# Altium PCB Camera Board.PcbDoc
Units mm, origin at the board's own origin, x right, y up, seen from the top; angles counter-clockwise.
Board outline 34.9 x 40.62 mm, 2 copper layers (Top Layer, Bottom Layer); 38 components, 43 nets, 192 pads, 30 vias.
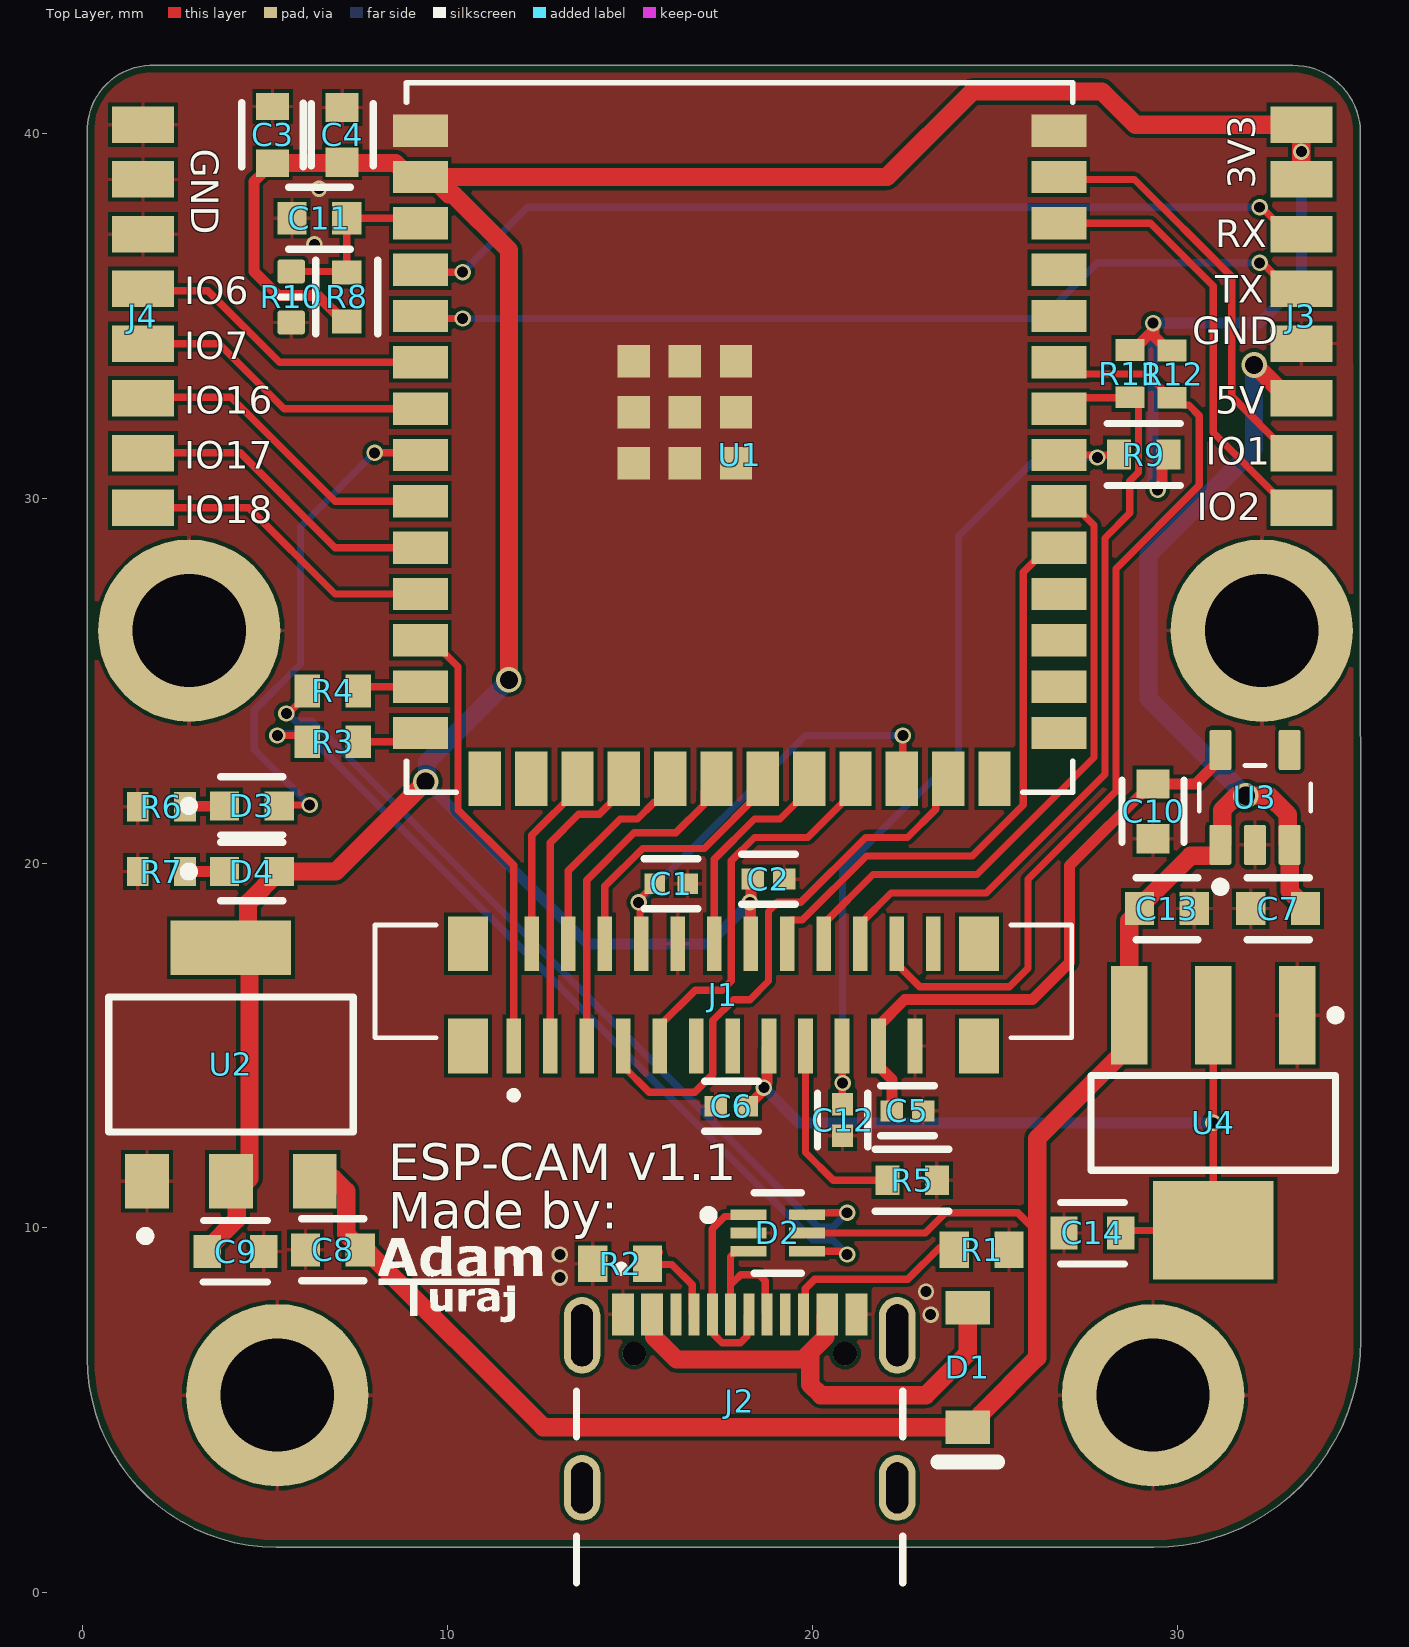
[diagram p0: Top Layer view]
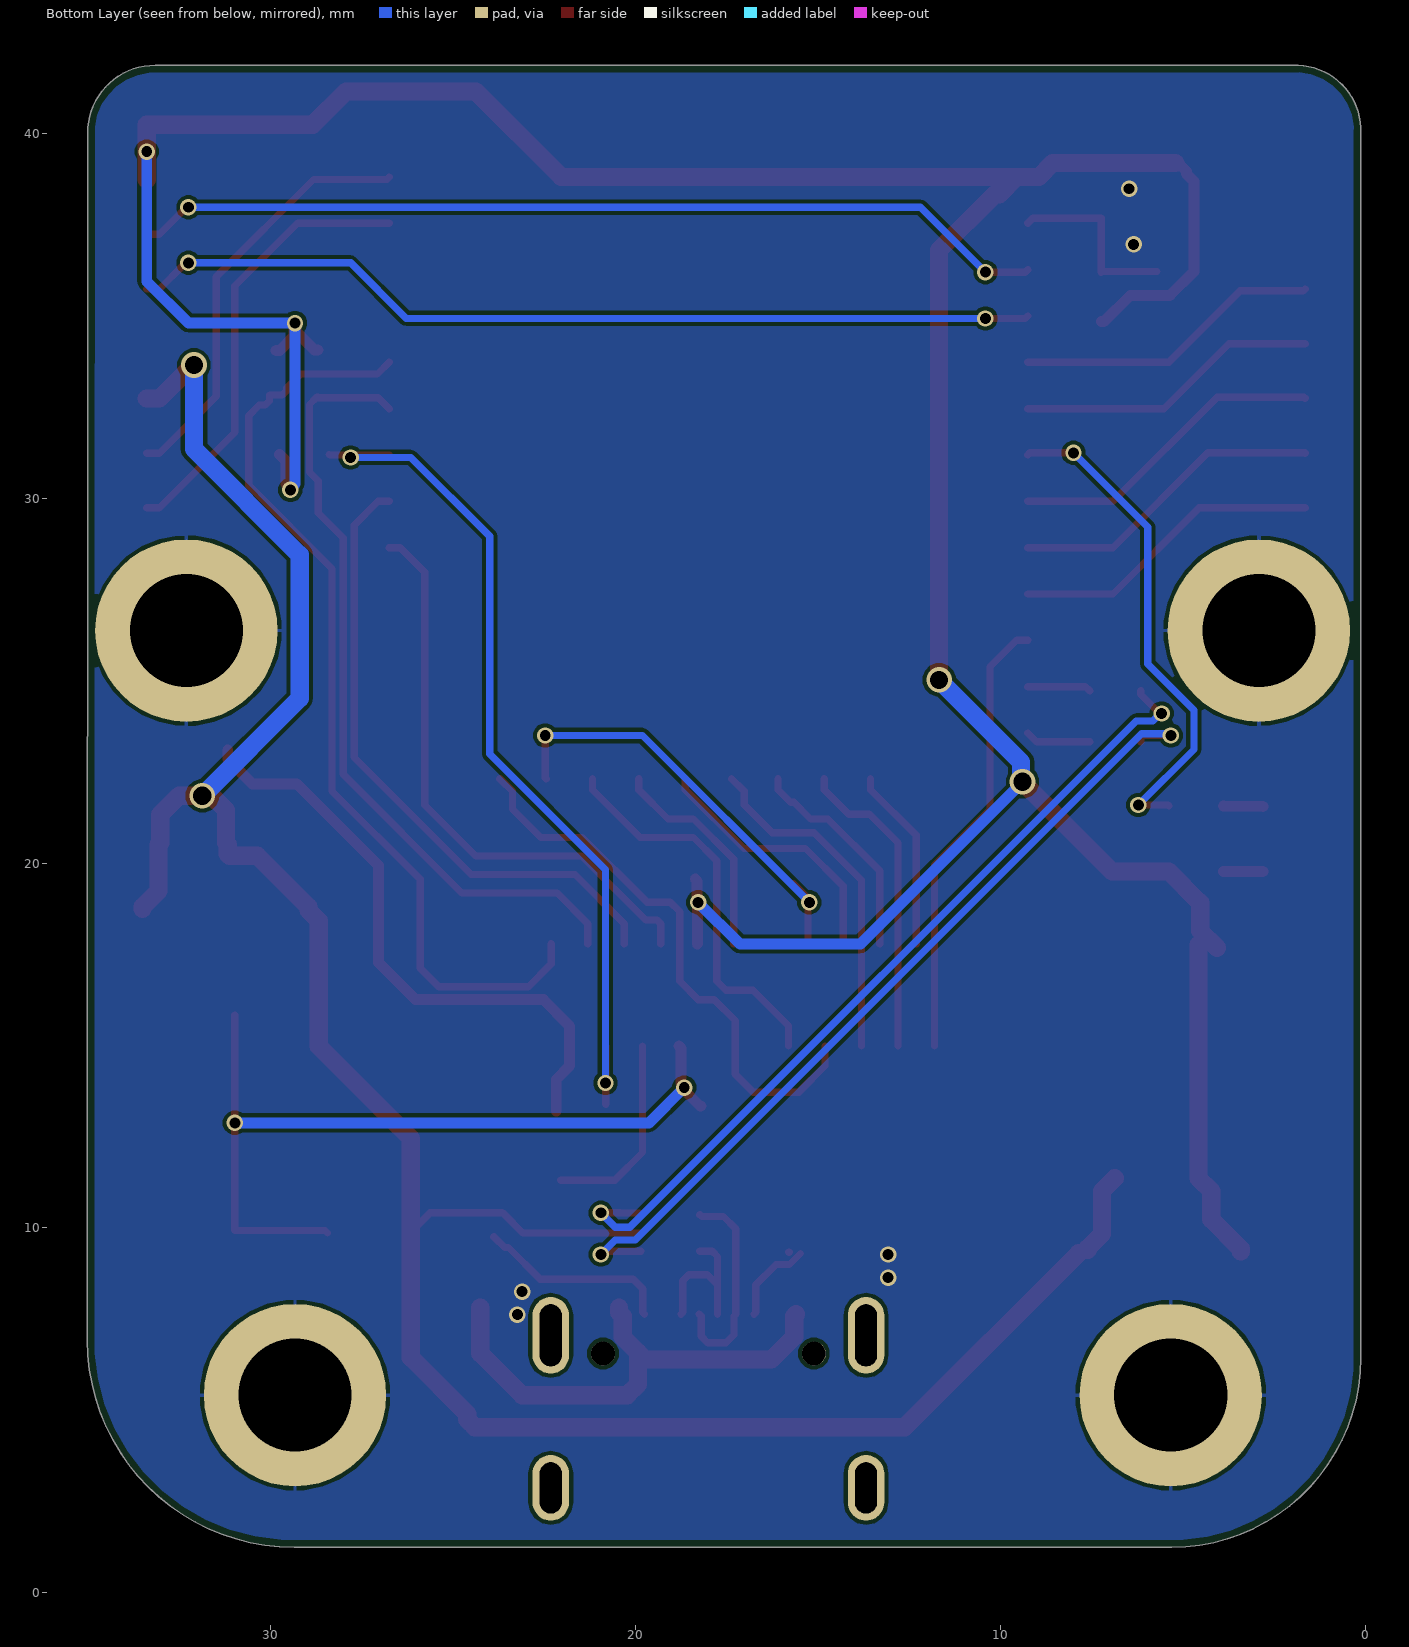
[diagram p1: Bottom Layer view, seen from below]
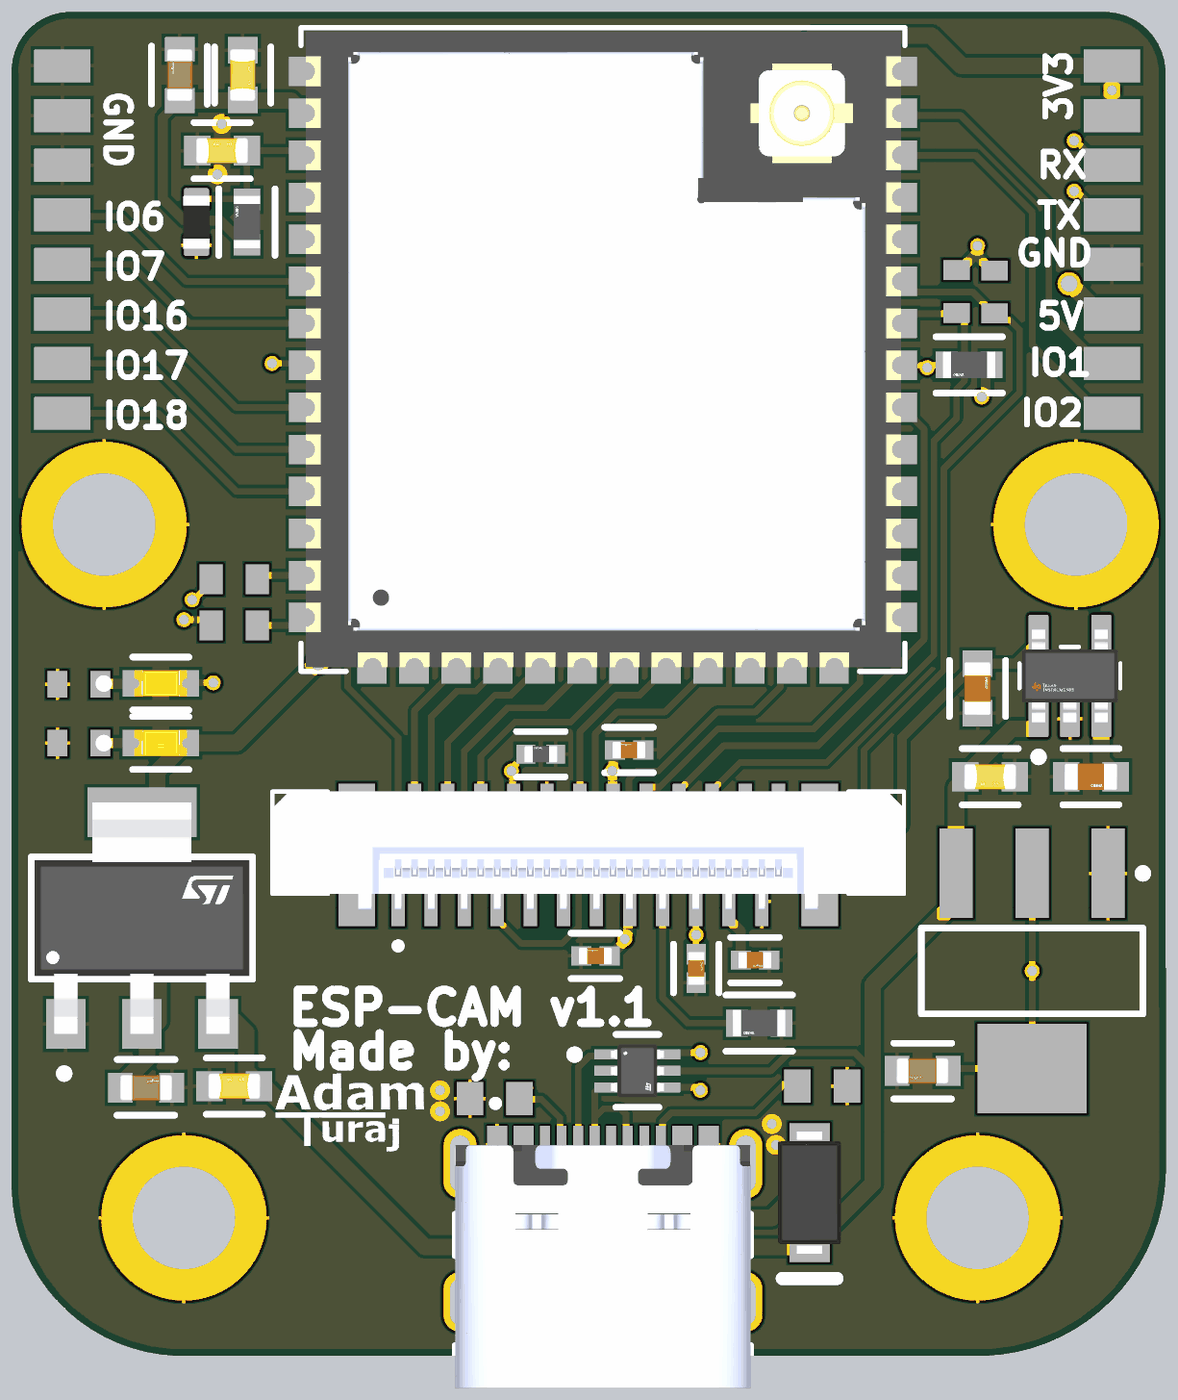
[diagram p2: 3D render of the assembled board from above, using the file's embedded part models]

## Layer stack, top to bottom
Top Solder: solder mask 0.0102, Solder Resist, Dk 3.5
Top Layer: signal copper 0.0356
Dielectric 1: dielectric 0.32, FR-4, Dk 4.8
Bottom Layer: signal copper 0.0356
Bottom Solder: solder mask 0.0102, Solder Resist, Dk 3.5

## Board outline
0.127,6.431 0.127,40.005 0.129,40.007 cw(c1.91,40.083) 1.993,41.864 33.167,41.864 cw(c33.167,40.01) 35.021,40.01 35.03,6.917 cw(c29.359,6.917) 29.359,1.246 5.312,1.246 cw(c5.312,6.431)

## Design rules (kind name [scope] priority, off if disabled: settings)
AcuteAngle [All] p1: minimum=6.00000000000000E+0001 checktracksonly=FALSE
BoardOutlineClearance [All] p1: gap=0.2 ignorepadtopadclearanceinfootprint=FALSE
Clearance [All] p1: gap=0.102 ignorepadtopadclearanceinfootprint=FALSE except(0.15: SMDPad-SMDPad; 0.202: Arc-THPad Track-THPad SMDPad-THPad Via-Via; 0.452: THPad-THPad)
DiffPairsRouting [All] p1: maxlimit=2 minlimit=0.15 mostfreqgap=0.15 toplayer_minwidth=0.2 toplayer_maxwidth=1816.048 toplayer_prefwidth=0.2 bottomlayer_minwidth=0.2 bottomlayer_maxwidth=1816.048 bottomlayer_prefwidth=0.2 maxuncoupledlength=12.7
Height [All] p1: minheight=0 maxheight=1816.048 prefheight=12.7
HoleSize [All] p1: absolutevalues=TRUE maxlimit=6.3 minlimit=0.15 maxpercent=80.000 minpercent=20.000
HoleToHoleClearance [All] p1: gap=0.2 allowstackedmicrovias=FALSE
MinimumAnnularRing [All] p1: minimumring=0.074
MinimumSolderMaskSliver [All] p1: minsoldermaskwidth=0
PlaneClearance [All] p1: clearance=0.102
PlaneConnect PlaneConnectPowerPads [InPadClass('PowerPads')] p1: planeconnectstyle=Direct reliefexpansion=0.508 reliefentries=4 reliefconductorwidth=0.254 reliefairgap=0.254
PlaneConnect [All] p2: pad.planeconnectstyle=Relief pad.reliefexpansion=0.3 pad.reliefentries=4 pad.reliefconductorwidth=0.102 pad.reliefairgap=0.102 via.planeconnectstyle=Direct via.reliefexpansion=0.3 via.reliefentries=4 via.reliefconductorwidth=0.127 via.reliefairgap=0.127
PolygonConnect "GND Connect ESP32" [HasFootprint('ESP32-S3-WROOM-1U_EXP')] p1: connectstyle=Direct reliefconductorwidth=0.254 reliefentries=4 polygonreliefangle="90 Angle" airgapwidth=0.254
PolygonConnect PolygonConnectPowerPads [All vs (InPadClass('PowerPads'))] p2: connectstyle=Direct reliefconductorwidth=0.254 reliefentries=4 polygonreliefangle="90 Angle" airgapwidth=0.254
PolygonConnect [All] p3: thpad.connectstyle=Relief thpad.reliefconductorwidth=0.102 thpad.reliefentries=4 thpad.polygonreliefangle="90 Angle" thpad.airgapwidth=0.102 smdpad.connectstyle=Relief smdpad.reliefconductorwidth=0.102 smdpad.reliefentries=4 smdpad.polygonreliefangle="90 Angle" smdpad.airgapwidth=0.102 via.connectstyle=Direct via.reliefconductorwidth=0.127 via.reliefentries=4 via.polygonreliefangle="90 Angle" via.airgapwidth=0.127
RoutingVias [All] p1: holewidth=0.2 width=0.45 viastyle="Through Hole" minholewidth=0.2 minwidth=0.45 maxholewidth=6.3 maxwidth=6.55
SilkToSilkClearance [All] p1: silktosilkclearance=0
SilkToSolderMaskClearance [IsPad] p1: minsilkscreentomaskgap=0.102 clearancetoexposedcopper=TRUE
SolderMaskExpansion [All] p1: expansion=0.075 istentingtop=FALSE
SupplyNets "Schematic Supply Nets_5" [InNet('2.8V')] p1: voltage=0.000
SupplyNets "Schematic Supply Nets_4" [InNet('1.2V')] p2: voltage=0.000
SupplyNets "Schematic Supply Nets_2" [InNet('GND')] p3: voltage=0.000
SupplyNets "Schematic Supply Nets_1" [InNet('5V')] p4: voltage=0.000
SupplyNets "Schematic Supply Nets" [InNet('3.3V')] p5: voltage=0.000
UnRoutedNet [All] p1: checkbadconnections=TRUE
Width [All] p1: maxlimit=1816.048 minlimit=0.102 preferedwidth=0.102
20 further rules are at their usual default settings.

## Classes and differential pairs
differential pair USB: +USB_P -USB_N

## Components (designator, comment, footprint, x,y, rotation, side; value= is the part's Value field where it differs from the comment)
C1 "15pF" FP-CC0402-0_55-IPC_B 16.129,19.431 r180 top
C2 "0.1uF" FP-GRM155-0_05-IPC_B 18.796,19.558 r180 top
C3 "10uF" FP-GRM18-0_15-MFG 5.207,39.959 r90 top
C4 "0.1uF" FP-CC0603-DA-MFG 7.112,39.959 r90 top value="100 nF"
C5 "0.1uF" FP-GRM155-0_05-IPC_B 22.606,13.208 r0 top
C6 "0.1uF" FP-GRM155-0_05-IPC_B 17.78,13.335 r180 top
C7 "1uF" FP-CC0603-DB-MFG 32.766,18.75 r180 top
C8 "0.1uF" FP-CC0603-DA-MFG 6.858,9.398 r180 top value="100 nF"
C9 "10uF" FP-GRM18-0_15-MFG 4.191,9.352 r0 top
C10 "1uF" FP-CC0603-DB-MFG 29.337,21.417 r270 top
C11 "0.1uF" FP-CC0603-DA-MFG 6.489,37.673 r180 top value="100 nF"
C12 "0.1uF" FP-GRM155-0_05-IPC_B 20.828,12.954 r90 top
C13 "0.1uF" FP-CC0603-DA-MFG 29.718,18.75 r0 top value="100 nF"
C14 "10uF" FP-GRM18-0_15-MFG 27.673,9.86 r180 top
D1 "SM4007PL" MCC-SOD-123FL_V 24.257,6.177 r270 top
D2 "USBLC6-2P6" FP-SOT-666-MFG 19.05,9.86 r0 top
D3 "LTST-C191GKT" FP-LTST-C191GKT-MFG 4.636,21.567 r0 top
D4 "LTST-C191GKT" FP-LTST-C191GKT-MFG 4.636,19.766 r0 top
J1 "F31W-1A7H1-11024" AMPHENOL_F31W-1A7H1-11024 17.562,16.756 r180 top
J2 "USB4105-GF-A" GCT_USB4105-GF-A 18.007,2.875 r0 top
J3 "Conn_Pad_01x08" CONN_SM08B-GHS-TB_JST 33.401,34.985 r90 top
J4 "Conn_Pad_01x08" CONN_SM08B-GHS-TB_JST 1.651,34.985 r90 top
R1 "5k1" RESC1608X55X25ML10T15 24.638,9.398 r0 top
R2 "5k1" RESC1608X55X25ML10T15 14.732,9.017 r180 top
R3 "22R" RESC1608X55X25NL10T15 6.858,23.322 r0 top
R4 "22R" RESC1608X55X25NL10T15 6.858,24.719 r0 top
R5 "1k" FP-RC0603-0_55-IPC_C 22.733,11.303 r180 top
R6 "470R" RESC1608X55X25LL10T15 2.159,21.544 r180 top
R7 "470R" RESC1608X55X25LL10T15 2.159,19.766 r180 top
R8 "10k" FP-RC0603-0_55-IPC_C 7.239,35.514 r90 top
R9 "10k" FP-RC0603-0_55-IPC_C 29.083,31.196 r180 top
R10 "Jumper 0603" RESC0603(1608)_L 5.715,35.514 r90 top value=0
R11 "4k7" RESC1608X55X25LL10T15 28.702,33.416 r90 top
R12 "4k7" RESC1608X55X25LL10T15 29.857,33.401 r90 top
U1 "ESP32-S3-WROOM-1U-N16R8" ESP32-S3-WROOM-1U_EXP 18.007,31.663 r0 top
U2 "LD1117S33CTR" FP-SOT-223-0046067_14-MFG 4.064,14.478 r90 top
U3 "TLV77328PDBVR" DBV0005A_MFG 32.131,21.798 r90 top
U4 "LD1117S12TR" SOT-223_M 30.988,12.879 r270 top

## Footprints (in the part's own frame and the unit in brackets; to place one, negate y for a bottom-side part, rotate by r counter-clockwise, add the part's x,y. Pads: shape width x height; smd on the part's side, far side on the other; paste and mask are expansions set on the pad)
AMPHENOL_F31W-1A7H1-11024 [mm]
  rect 0.4x1.5 smd: 1(5.75,1.77) 2(5.25,-1.03) 3(4.75,1.77) 4(4.25,-1.03) 5(3.75,1.77) 6(3.25,-1.03) 7(2.75,1.77) 8(2.25,-1.03) 9(1.75,1.77) 10(1.25,-1.03) 11(0.75,1.77) 12(0.25,-1.03) 13(-0.25,1.77) 14(-0.75,-1.03) 15(-1.25,1.77) 16(-1.75,-1.03) 17(-2.25,1.77) 18(-2.75,-1.03) 19(-3.25,1.77) 20(-3.75,-1.03) 21(-4.25,1.77) 22(-4.75,-1.03) 23(-5.25,1.77) 24(-5.75,-1.03)
  rect 1.1x1.5 smd: SH1(7,-1.03) SH2(-7,-1.03) SH3(7,1.77) SH4(-7,1.77)
  silkscreen extent -9.55,-1.55 9.55,3.22, body extent -9.55,-1.55 9.55,2.02, height 4.25
CONN_SM08B-GHS-TB_JST [mm]
  rect 1x1.702 smd paste+0 mask+0: 1(-5.25,0) 2(-3.75,0) 3(-2.25,0) 4(-0.75,0) 5(0.75,0) 6(2.25,0) 7(3.75,0) 8(5.25,0)
DBV0005A_MFG [mm] "Recommended Land Pattern"
  rrect17% 1.1x0.6 smd: 1(-1.3,0.95) 2(-1.3,0) 3(-1.3,-0.95) 4(1.3,-0.95) 5(1.3,0.95)
  silkscreen extent -2.57,-1.53 0.87,1.53, body extent -1.95,-1.78 1.95,1.78, height 0.25
ESP32-S3-WROOM-1U_EXP [mil]
  rect 59x35 smd paste+0 mask+0: 1(-344.49,331.1) 2(-344.49,281.1) 3(-344.49,231.1) 4(-344.49,181.1) 5(-344.49,131.1) 6(-344.49,81.1) 7(-344.49,31.1) 8(-344.49,-18.9) 9(-344.49,-68.9) 10(-344.49,-118.9) 11(-344.49,-168.9) 12(-344.49,-218.9) 13(-344.49,-268.9) 14(-344.49,-318.9) 27(344.49,-318.9) 28(344.49,-268.9) 29(344.49,-218.9) 30(344.49,-168.9) 31(344.49,-118.9) 32(344.49,-68.9) 33(344.49,-18.9) 34(344.49,31.1) 35(344.49,81.1) 36(344.49,131.1) 37(344.49,181.1) 38(344.49,231.1) 39(344.49,281.1) 40(344.49,331.1)
  rect 35x59 smd paste+0 mask+0: 15(-275,-368.11) 16(-225,-368.11) 17(-175,-368.11) 18(-125,-368.11) 19(-75,-368.11) 20(-25,-368.11) 21(25,-368.11) 22(75,-368.11) 23(125,-368.11) 24(175,-368.11) 25(225,-368.11) 26(275,-368.11)
  rect 35x35 smd paste+0 mask+0: 41(-59.06,27.17) 42(-114.17,82.28) 43(-114.17,27.17) 44(-114.17,-27.95) 45(-59.06,-27.95) 46(-3.94,-27.95) 47(-3.94,27.17) 48(-3.94,82.28) 49(-59.06,82.28)
  silkscreen extent -360,-383 359,383, body extent -354,-378 355,378, height 132
FP-CC0402-0_55-IPC_B [mm]
  rect 0.568x0.572 smd paste+0 mask+0: 1(-0.452,0) 2(0.452,0)
  silkscreen extent -0.74,-0.69 0.74,0.69, body extent -0.89,-0.44 0.89,0.44, height 0.25
FP-CC0603-DA-MFG [mm]
  rect 0.8x0.9 smd paste+0 mask+0: 1(-0.75,0) 2(0.75,0)
  silkscreen extent -0.85,-0.85 0.85,0.85, body extent -1.35,-0.75 1.35,0.75, height 0.25
FP-CC0603-DB-MFG [mm]
  rect 0.8x0.9 smd paste+0 mask+0: 1(-0.75,0) 2(0.75,0)
  silkscreen extent -0.85,-0.85 0.85,0.85, body extent -1.43,-0.82 1.43,0.82, height 0.25
FP-GRM18-0_15-MFG [mm]
  rect 0.75x0.9 smd paste+0 mask+0: 1(-0.775,0) 2(0.775,0)
  silkscreen extent -0.88,-0.83 0.87,0.85, body extent -1.25,-0.58 1.25,0.58, height 0.25
FP-GRM155-0_05-IPC_B [mm]
  rect 0.615x0.572 smd paste+0 mask+0: 1(-0.429,0) 2(0.429,0)
  silkscreen extent -0.74,-0.69 0.74,0.69, body extent -0.89,-0.44 0.89,0.44, height 0.25
FP-LTST-C191GKT-MFG [mm]
  rect 0.8x0.8 smd paste+0 mask+0: 1(-0.75,0) 2(0.75,0)
  silkscreen extent -1.85,-0.8 0.85,0.8, body extent -1.25,-0.55 1.25,0.55, height 0.25
FP-RC0603-0_55-IPC_C [mm]
  rect 0.659x0.812 smd paste+0 mask+0: 1(-0.677,0) 2(0.677,0)
  silkscreen extent -1.01,-0.85 1.01,0.85, body extent -1.11,-0.55 1.11,0.55, height 0.25
FP-SOT-223-0046067_14-MFG [mm]
  rect 1.5x1.2 smd paste+0 mask+0: 1(-3.2,2.3) 2(-3.2,0) 3(-3.2,-2.3)
  rect 1.5x3.3 smd paste+0 mask+0: 4(3.2,0)
  silkscreen extent -4.82,-3.35 1.85,3.35, body extent -4.05,-3.45 4.05,3.45, height 0.25
FP-SOT-666-MFG [mm]
  rect 0.99x0.3 smd paste+0 mask+0: 1(-0.805,0.5) 2(-0.805,0) 3(-0.805,-0.5) 4(0.805,-0.5) 5(0.805,0) 6(0.805,0.5)
  silkscreen extent -2.02,-1.1 0.65,1.1, body extent -1.4,-0.95 1.4,0.95, height 0.25
GCT_USB4105-GF-A [mm]
  rect 0.6x1.15 smd mask+0.05: A1_B12(-3.2,4.755) A4_B9(-2.4,4.755) B1_A12(3.2,4.755) B4_A9(2.4,4.755)
  rect 0.3x1.15 smd mask+0.05: A5(-1.25,4.755) A6(-0.25,4.755) A7(0.25,4.755) A8(1.25,4.755) B5(1.75,4.755) B6(0.75,4.755) B7(-0.75,4.755) B8(-1.75,4.755)
  oval 1x2.1 hole 0.6 slot 1.7 at 90 deg: SH1(-4.32,4.18) SH2(4.32,4.18)
  oval 1x1.8 hole 0.6 slot 1.4 at 90 deg: SH3(-4.32,0) SH4(4.32,0)
  round 0.65 hole 0.65 unplated: ""(-2.89,3.68) ""(2.89,3.68)
  silkscreen extent -4.47,-2.6 4.47,6.1, body extent -4.47,-2.6 4.47,5.11, height 3.17
MCC-SOD-123FL_V [mil] "SODFL, 2-Leads, Body 3.1x1.9mm"
  rect 36x48 smd: 1(-64.5,0) 2(64.5,0)
  silkscreen extent 102,-32 102,32, body extent -73,-37 73,37, height 47
RESC0603(1608)_L [mm] "Chip Resistor, Body 1.6x0.8mm, IPC High Density"
  rrect25% 0.66x0.76 smd: 1(-0.7,0) 2(0.7,0)
  silkscreen extent 0,-0.3 0,0.3, body extent -0.8,-0.4 0.8,0.4, height 0.45
RESC1608X55X25LL10T15 [mm] "Chip Resistor, 2-Leads, Body 1.70x0.90mm, IPC High Density"
  rect 0.6x0.8 smd: 1(-0.65,0) 2(0.65,0)
  body extent -0.85,-0.45 0.85,0.45, height 0.55
RESC1608X55X25ML10T15 [mm] "Chip Resistor, 2-Leads, Body 1.60x0.80mm, IPC Low Density"
  rect 0.8x1 smd: 1(-0.75,0) 2(0.75,0)
  body extent -0.85,-0.45 0.85,0.45, height 0.55
RESC1608X55X25NL10T15 [mm] "Chip Resistor, 2-Leads, Body 1.70x0.90mm, IPC Medium Density"
  rect 0.7x0.9 smd: 1(-0.7,0) 2(0.7,0)
  body extent -0.85,-0.45 0.85,0.45, height 0.55
SOT-223_M [mm] "SOT223, 4-Leads, Body 6.5x3.5mm, Pitch 2.3mm, Lead Span 7mm, IPC Low Density"
  rect 2.7x1 smd: 1(-2.95,2.3) 2(-2.95,0) 3(-2.95,-2.3)
  rect 2.7x3.3 smd: 4(2.95,0)
  silkscreen extent -3.07,-3.35 1.3,3.48, body extent -1.85,-3.35 1.85,3.35, height 1.8

## Part data
C1: library part CMP-03422-001519-1, "CAP CER 15PF 50V C0G/NPO 0402", Case Code (Imperial)=0402, Case Code (Metric)=1005, Dielectric=C0G, Dielectric Material=Ceramic, Insulation Resistance=100GR, JLCNUM=C1548, Max Operating Temperature=125°C, Min Operating Temperature=-55°C, Package Quantity=1, Tolerance=5%, Voltage=50V, Capacitance=15pF, Case/Package=0402, Depth=0.5mm, Height=0.5mm, Lead Free="Lead Free", Length=1mm, Mount="Surface Mount", Number of Pins=2, Packaging="Tape and Reel", Radiation Hardening=No, REACH SVHC="No SVHC", Resistor Type=Ceramic, RoHS Compliant=Yes, Series=CC, Termination=SMD/SMT, Thickness=0.022inch, Voltage Rating=50V, Voltage Rating (DC)=50V, Width=0.02inch
C2 C5 C6 C12: library part CMP-2008-04639-2, "Chip Multilayer Ceramic Capacitors for General Purpose, 0402, 0.10uF, X7R, 15%, 10%, 50V", Capacitance=100nF, Case Code (Imperial)=0402, Case Code (Metric)=1005, Dielectric=X7R, Dielectric Material=Ceramic, JLCNUM=C307331, Max Operating Temperature=125°C, Min Operating Temperature=-55°C, Package Quantity=10000, Tolerance=10%, Voltage=50V, Case/Package=0402, Depth=0.5mm, Dissipation Factor=0.025%, Height=0.5mm, Lead Free="Lead Free", Length=1mm, Material=Ceramic, Mount="Surface Mount", Packaging="Tape and Reel", REACH SVHC="No SVHC", Resistor Type=Ceramic, Termination=SMD/SMT, Thickness=0.022inch, Voltage Rating=50V, Voltage Rating (DC)=50V, Weight=0.000212oz, Width=0.5mm
C3 C9 C14: library part CMP-2000-05448-2, "CAP CER 10UF 10V X5R 0603", JLCNUM=C19702, Manufacturer=Murata, Manufacturer Part Number=GRM188R61A106KE69D, Package=GRM18-0.15, Temperature="-55°C to +85°C", Temperature Characteristic=X5R, Temperature Coefficient=15%, Temperature Range High=+85°C, Temperature Range Low=-55°C, Tolerance=10%, Voltage Rating=10V, Automotive=No, Capacitance=10uF, Category=Cap, ComponentLink2Description=Datasheet, ComponentLink2URL=https://search.murata.co.jp/Ceramy/image/img/A01X/G101/ENG/GRM188R61A106KE69-01A.pdf, Device Class L1="Passive Components", Device Class L2=Capacitors, Device Class L3="Ceramic Capacitors", Digikey Description="CAP CER 10UF 10V X5R 0603", Height=0.95mm, Lead Free=Yes, Material=Ceramic, Mouser Description="Multilayer Ceramic Capacitors MLCC - SMD/SMT 0603 10uF 10volts X5R + - 10%", Octopart=https://octopart.com/grm188r61a106ke69d-murata-22851381, RoHS=TRUE
C4 C8 C11 C13: library part CMP-2100-03601-2, "CAP CER 0.1UF 50V X7R 0603", Capacitance="100 nF", JLCNUM=C14663, Manufacturer=YAGEO, Manufacturer Part Number=CC0603KRX7R9BB104, Package=CC0603-DA, Temperature="-55°C to +125°C", Temperature Characteristic=X7R, Temperature Coefficient=15%, Temperature Range High=+125°C, Temperature Range Low=-55°C, Tolerance=0.1, Voltage="50 V", Automotive=No, Category=Cap, ComponentLink2Description=Datasheet, ComponentLink2URL=http://www.yageo.com/documents/recent/UPY-GPHC_X7R_6.3V-to-50V_18.pdf, Device Class L1="Passive Components", Device Class L2=Capacitors, Device Class L3="Ceramic Capacitors", Digikey Description="CAP CER 0.1UF 50V X7R 0603", Footprint Url=http://www.yageo.com/exep/pages/download/literatures/UPY-C_GEN_24.pdf, Height=0.9mm, Lead Free=Yes, Material=Ceramic, Mouser Description="Multilayer Ceramic Capacitor, CC Series, 0.1 - F, - 10%, X7R, 50 V, 0603 [1608 Metric]", Octopart=https://octopart.com/cc0603krx7r9bb104-yageo-42244635, RoHS=TRUE, Voltage Rating="50 V"
C7 C10: library part CMP-03422-000761-2, "CAP CER 1UF 50V X7R 0603", Case Code (Imperial)=0603, Case Code (Metric)=1608, Dielectric=X7R, JLCNUM=C15849, Max Operating Temperature=125°C, Min Operating Temperature=-55°C, Package Quantity=4000, Resistor Type=Ceramic, Tolerance=10%, Voltage Rating=50V, Capacitance=1uF, Case/Package=0603, Halogen Free="Halogen Free", Lead Free="Lead Free", Length=0.063inch, Mount="Surface Mount", Packaging="Tape and Reel", Termination=SMD/SMT, Thickness=0.035inch, Voltage Rating (DC)=50V, Weight=7.1E-05oz, Width=0.031inch
D1: library part CMP-2000-07084-1, "Silion Rectifier, 1 A, 1000 V, -65 to 175 degC, 2-Pin SMD, RoHS, Tape and Reel", Forward Current If(AV)=1A, Forward Surge Current Ifsm Max=30A, Forward Voltage VF Max=1.1V, JLCNUM=C64898, Manufacturer="Micro Commercial Components", Package Description="2-Pin Small Outline Diode, Flat Lead, Body 2.825 x 1.65 mm", Package Reference=SOD-123FL, Repetitive Reverse Voltage Vrrm Max=1kV, Datasheet URL=http://www.mccsemi.com/up_pdf/SM4001PL-SM4007PL(SOD-123FL).PDF, Datasheet Version="Rev. H, 05/2015", Diode Configuration=Single, Diode Type=StandardRecovery, Manufacturer URL=http://www.mccsemi.com/, Mounting Technology=SurfaceMount
D2: library part CMP-12225-000058-1, "TVS DIODE 5.25V 17V SOT666", Breakdown Voltage=6V, Capacitance=3.5pF, Case/Package=SOT-666, Clamping Voltage=17V, JLCNUM=C15999, Leakage Current=150nA, Max Operating Temperature=125°C, Min Operating Temperature=-40°C, Operating Supply Voltage=5V, Package Quantity=1, Peak Pulse Current=5A, Power Line Protection=Yes, Test Current=1mA, Contact Plating=Tin, Depth=1.3mm, Direction=Unidirectional, Element Configuration=Dual, ESD Protection=Yes, Height=0.6mm, Lead Free="Lead Free", Length=1.7mm, Max Breakdown Voltage=6V, Max Reverse Leakage Current=150nA, Min Breakdown Voltage=6V, Mount="Surface Mount", Number of Bidirectional Channels=2, Number of Channels=2, Number of Elements=1, Number of Pins=6, Packaging="Tape and Reel", Polarity=Unidirectional, Radiation Hardening=No, REACH SVHC="No SVHC", Reverse Breakdown Voltage=6V, Reverse Standoff Voltage=5V, Termination=SMD/SMT, Width=1.3mm, Working Voltage=5V
D3 D4: library part CMP-22017-000029-1, "LED GREEN CLEAR CHIP SMD", Case Code (Imperial)=0603, Case Code (Metric)=1608, Color=Green, Forward Current=30mA, Forward Voltage=2.1V, JLCNUM=C99289, Lens Color=Colorless, Max Operating Temperature=85°C, Min Operating Temperature=-55°C, Package Quantity=1, Power Dissipation=100mW, Reverse Voltage=5V, Test Current=20mA, Case/Package=0603, Depth=0.8mm, Dominant Wavelength=569nm, Height=0.55mm, Illumination Color=Green, Lead Free="Lead Free", Length=1.6mm, Lens Style=Clear, Lens Transparency=Clear, Luminous Intensity=12mcd, Mount="Surface Mount", Number of Elements=1, Number of LEDs=1, Number of Pins=2, Packaging="Tape and Reel", Power Rating=100mW, Radiation Hardening=No, Viewing Angle=130°, Wavelength=565nm, Width=0.8mm
J1: library part CMP-002-00071-1, "Flex Connector, 0.50mm Pitch, Height 4.25mm, Vertical, Slider type, ZIF, 24 position, Without MYLAR", Case/Package=None, JLCNUM=C5406215, Check_prices=https://www.snapeda.com/parts/F31W-1A7H1-11024/Amphenol/view-part/?ref=eda, Component Type=Standard, Design Item ID=F31W-1A7H1-11024, MF="Amphenol ICC / Aorora", MP=F31W-1A7H1-11024, Pins=24, SnapEDA_Link=https://www.snapeda.com/parts/F31W-1A7H1-11024/Amphenol/view-part/?ref=snap, Source=F31W-1A7H1-11024.SchLib
J2: library part CMP-003-000000-3, JLCNUM=C2765186, Package=None, Availability=Unavailable, Component Type=Standard, Design Item ID=USB4105-GF-A, MF="{'manufacturer': u'GCT'}", MP=USB4105-GF-A, Pin Count=16, Price=None, Source=USB4105-GF-A.SchLib
J3 J4: library part CMP-005-000000-3, "Description", Copyright="Copyright (C) 2026 Ultra Librarian. All rights reserved.", Design Item ID=Conn_Pad_8, RefDes=RefDes, Type=Type
R1 R2: library part CMP-2000-04091-1, JLCNUM=C23186, Manufacturer=Yageo, Part Number=RC0603FR-075K1L
R3 R4: library part CMP-1659-00033-1, "Chip Resistor, 22 Ohm, +/- 1%, 0.1 W, -55 to 155 degC, 0603 (1608 Metric), RoHS, Tape and Reel", Case\Package=SIP, JLCNUM=C23345, Max Input Voltage="1.4 V", Max Operating Temperature="100 degC", Max Ouput Current="8 A", Min Operating Temperature="-25 degC", Package Quantity=200, ComponentLink1Description="Manufacturer URL", ComponentLink1URL=http://www.yageo.com/, ComponentLink2Description=Datasheet, ComponentLink2URL=http://www.yageo.com/documents/recent/PYu-RC_Group_51_RoHS_L_04.pdf, DatasheetVersion="Rev. 4, 02/2016", Height="19.6 mm", Length="18.5 mm", Mount="Through Hole", Output Current="8 A", PackageDescription="2-Pin Surface Mount Device, Body 1.6 x 0.8 mm", PackageReference=0603, Packaging=Rail/Tube, Pins=4, Radiation Hardening=No, REACH SVHC=Unknown, RoHSCompliant=true
R5: library part CMP-1659-00009-5, "RES 1K OHM 1% 1/10W 0603", Case Code (Imperial)=0603, Case Code (Metric)=1608, JLCNUM=C21190, Max Operating Temperature=155°C, Max Power Dissipation=100mW, Min Operating Temperature=-55°C, Resistance=1kR, Resistance Tolerance=1%, Resistor Type="Thick Film", Temperature Coefficient=100ppm/°C, Voltage Rating=50V, Case/Package=0603, Construction=Rectangular, Contact Plating=Tin, Depth=0.8mm, Features="Moisture Resistant", Height=0.45mm, Lead Free="Lead Free", Length=1.6mm, Military Standard=Not, Number of Terminations=2, Packaging="Tape and Reel", Power Rating=100mW, Radiation Hardening=No, REACH SVHC="No SVHC", RoHS Compliant=Yes, Series=RC, Size Code=0603, Technology="THICK FILM", Termination=SMD/SMT, Tolerance=1%
R6 R7: library part CMP-1659-00035-2, "General Purpose Chip Resistor, 470 Ohm, +/- 1%, -55 to 155 degC, 0603 (1608 Metric), RoHS, Tape and Reel", JLCNUM=C23179, Max Operating Temperature="90 degC", Min Operating Temperature="-40 degC", Package Quantity=2500, Resistance="470 Ohm", ComponentLink1Description="Manufacturer URL", ComponentLink1URL=http://www.yageo.com/, ComponentLink2Description=Datasheet, ComponentLink2URL=https://datasheet.ciiva.com/11808/0900766b80f96399-11808177.pdf, Contact Material=Brass, Contact Plating=Gold, DatasheetVersion="Rev. 4, 04/2009", Fastening Type=Snap, Height="1.25 mm", Length="3 mm", Mount="Surface Mount", PackageDescription="2-Pin Surface Mount Device, Body 1.6 x 0.8 mm", PackageReference=0603, Packaging="Tape and Reel", Radiation Hardening=No, RoHSCompliant=true, Width="3.1 mm"
R8 R9: library part CMP-2100-03664-2, "RES 10K OHM 1% 1/10W 0603", Case Code (Imperial)=0603, Case Code (Metric)=1608, JLCNUM=C25804, Max Operating Temperature=155°C, Max Power Dissipation=100mW, Min Operating Temperature=-55°C, Resistance=10kR, Resistance Tolerance=1%, Resistor Type="Thick Film", Temperature Coefficient=100ppm/°C, Voltage Rating=75V, Voltage Rating (DC)=50V, Case/Package=0603, Construction=Rectangular, Depth=0.8mm, Features="Moisture Resistant", Height=0.45mm, Lead Free="Lead Free", Lead Pitch=0.3mm, Length=1.6mm, Military Standard=Not, Number of Pins=2, Number of Terminations=2, Packaging="Tape and Reel", Power Rating=100mW, RoHS Compliant=Yes, Series=RC, Size Code=0603, Termination=SMD/SMT, Tolerance=1%, Weight=7.1E-05oz, Width=0.8mm
R10: library part CMP-009-00175-3, Case/Package=0603, Max Operating Temperature=155°C, Min Operating Temperature=-55°C, Pins=2
R11 R12: library part CMP-2000-06942-1, "Chip Resistor, 4.7 KOhm, +/- 1%, 0.1 W, -55 to 155 degC, 0603 (1608 Metric), RoHS, Tape and Reel", Case Code - in=0603, Case Code - mm=1608, JLCNUM=C23162, Manufacturer=Yageo, Operating Temperature Range=-55Cto+155C, Package Description="2-Pin Surface Mount Device, Body 1.6 x 0.8 mm", Power Rating=100mW, Resistance=4.7kOhms, Temperature Coefficient=100PPM/C, Tolerance=1%, Voltage Rating=50V, Datasheet URL=http://www.yageo.com/documents/recent/PYu-RC_Group_51_RoHS_L_7.pdf, Datasheet Version="Rev. 7, 05/2017", Manufacturer URL=http://www.yageo.com/, Mounting Technology=SurfaceMount, Package Reference=0603, Packaging=Reel, Product=ThickFilmResistorsGeneralPurpose, Series=RC, Termination Style=SMD/SMT
U1: library part CMP-288-000000-2, "Description", JLCNUM=C3013946, Manufacturer_Name="Espressif Systems", Copyright="Copyright (C) 2025 Ultra Librarian. All rights reserved.", Design Item ID=ESP32-S3-WROOM-1U-N16R8, Manufacturer_Part_Number=ESP32-S3-WROOM-1U-N16R8, RefDes=RefDes, Source=ESP32-S3-WROOM-1U-N16R8.SchLib, Type=Type
U2: library part CMP-0244-00307-2, "IC REG LINEAR 3.3V 800MA SOT223", Case/Package=SOT-223, Dropout Voltage=1.1V, Input Bias Current=5mA, JLCNUM=C35879, Max Input Voltage=15V, Max Operating Temperature=125°C, Max Output Current=1.3A, Max Output Voltage=3.3V, Max Power Dissipation=12W, Min Input Voltage=5.3V, Min Operating Temperature=-40°C, Output Current=950mA, Output Voltage Accuracy=1%, Package Quantity=1, Quiescent Current=10mA, Accuracy=1%, Contact Plating=Tin, Height=1.8mm, Lead Free="Lead Free", Length=6.5mm, Max Supply Voltage=15V, Min Output Voltage=3.3V, Min Supply Voltage=3.3V, Mount="Surface Mount", Nominal Output Voltage=3.3V, Number of Outputs=1, Number of Pins=4, Number of Regulators=1, Number of Terminals=4, Output Type=Fixed, Output Voltage=3.3V, Packaging="Tape and Reel", Polarity=Positive, Power Dissipation=12W, Radiation Hardening=No, REACH SVHC="No SVHC", Termination=SMD/SMT, Weight=0.01lb, Width=3.5mm
U3: library part CMP-00370-149257704-1, "300-mA high-PSRR low-IQ low-dropout regulator with enable 5-SOT-23 -40 to 85", Case/Package=SOT-23, JLCNUM=C31261045, Manufacturer Lifecycle Status=ACTIVE, ComponentLink1Description="Manufacturer's Website", ComponentLink1URL=http://ti.com, ComponentLink2Description="Datasheet URL", ComponentLink2URL=https://www.ti.com/lit/ds/symlink/tlv773.pdf, Height=1.45mm, HelpURL=https://www.ti.com/lit/ds/symlink/tlv773.pdf, Length=2.9mm, Lifecycle Status=Production, Number of Pins=5, RoHS=Compliant, Thickness=1.2mm, Width=1.6mm
U4: library part CMP-0244-00318-1, "Fixed Low Drop Positive Voltage Regulator, 1.2V, 4-Pin SOT-223, Tape and Reel", JLCNUM=C155612, ComponentLink1Description="Manufacturer URL", ComponentLink1URL=http://www.st.com, ComponentLink2Description=Datasheet, ComponentLink2URL=http://www.st.com/internet/com/TECHNICAL_RESOURCES/TECHNICAL_LITERATURE/DATASHEET/CD00000544.pdf, DatasheetVersion=1/11/2011, PackageDescription="4-Pin SOT-223 Package, 6.5 x 3.5 mm Body, 2.3 mm Pitch, 7 mm Lead Span", PackageReference=SOT-223, PackageVersion=2010

## Free pads (board coordinates)
  round 5 hole 3.1: 7(2.921,26.37) 7(5.334,5.415) 7(29.337,5.415) 7(32.315,26.37)

## Via types
v1: diameter 0.45, hole 0.3, Top Layer to Bottom Layer, 26 vias
v2: diameter 0.7, hole 0.5, Top Layer to Bottom Layer, 4 vias

## Nets (pads, with @x,y where several pads share a name; then routed paths per layer and width w, separated by ;. In a path a pad name is that pad's centre, name@x,y a point inside that pad or via, vN(x,y) a via of type N, cw(c..) or ccw(c..) an arc to the next point about the centre after c; other vN are vias at no path point)
1.2V: C6.1 C14.1 J1.15 U4.2 U4.4 | length 23.1
  Top Layer w0.2: C14.1 28.517,9.929 U4.4 v1(30.988,12.879) U4.2
  Top Layer w0.3: C6.1 18.23,13.335 18.64,13.745 18.64,13.814 v1(18.669,13.843) 18.669,13.884 18.762,13.977 18.762,14.936 J1.15
  Bottom Layer w0.3: v1(18.669,13.843) 19.633,12.879 v1(30.988,12.879)
2.8V: C5.1 C10.1 J1.21 U3.5 | length 16.7
  Top Layer w0.3: C5.1 22.177,14.071 21.812,14.436 J1.21 21.812,15.536 22.532,16.256 26.035,16.256 27.051,17.272 27.051,19.931 29.287,22.167 C10.1 30.5,22.167 31.181,22.848 U3.5
3.3V: C2.2 C3.1 C4.1 C9.1 D4.2 J1.14 J3.7 J3.8 R8.1 R9.1 R11.2 R12.2 U1.2 U2.2 U2.4 | length 101.2
  Top Layer w0.3: C3.1 5.132,39.184 4.907,38.959 4.907,38.884 4.699,38.676 4.699,36.212 5.351,35.56 6.44,35.56 7.162,34.837 R8.1 ; J1.14 18.3,17.798 18.3,18.911 v1(18.288,18.923) 18.317,18.952 18.317,19.507 C2.2 ; R11.2 28.802,34.066 29.308,34.572 ; v1(29.337,34.798) 29.366,34.769 29.366,34.442 29.757,34.051 R12.2 ; v1(29.464,30.226) 29.464,30.267 29.58,30.383 29.58,31.017 R9.1
  Top Layer w0.5: C9.1 3.416,9.427 4.222,10.233 4.222,11.009 4.572,11.359 U2.4@4.572,17.759 ; U2.4 4.529,18.143 4.529,18.909 D4.2 6.939,19.766 v2(9.398,22.225) ; C3.1 7.112,39.184 8.571,39.184 8.952,38.803 U1.2 U1.2@9.562,38.803 ; v2(11.684,25.019) 11.684,36.797 10.152,38.329 10.035,38.329 U1.2@9.562,38.803 ; J3.7 v1(33.401,39.497) J3.8 28.853,40.235 27.94,41.148 24.384,41.148 22.039,38.803 U1.2@9.562,38.803
  Bottom Layer w0.3: v2(9.398,22.225) 13.843,17.78 17.145,17.78 v1(18.288,18.923) ; v1(29.464,30.226) 29.464,30.267 29.337,30.394 v1(29.337,34.798) 32.258,34.798 33.401,35.941 v1(33.401,39.497)
  Bottom Layer w0.5: v2(9.398,22.225) 9.436,22.263 9.436,22.771 v2(11.684,25.019)
5V: C7.1 C8.1 C13.1 D1.2 D2.5 J3.3 U2.3 U3.1 U3.3 U4.3 | length 68.7
  Top Layer w0.2: D2.5 23.094,9.86 23.648,10.414 25.628,10.414 26.271,9.771 26.271,9.652
  Top Layer w0.5: U2.3@6.872,11.359 7.222,11.009 7.222,9.834 7.608,9.448 C8.1 ; C8.1@7.862,9.302 12.625,4.539 24.409,4.539 24.617,4.746 24.617,4.898 26.162,6.444 26.162,12.453 28.688,14.979 U4.3 28.688,18.42 28.968,18.7 C13.1 28.968,18.8 30.366,20.198 31.131,20.198 31.181,20.248 U3.1 31.231,20.548 31.231,21.452 31.623,21.844 v2(31.877,21.844) 32.512,21.844 33.031,21.325 33.031,20.548 U3.3 33.081,19.235 33.516,18.8 C7.1 ; v2(32.106,33.65) 32.135,33.65 33.05,32.735 J3.3
  Bottom Layer w0.5: v2(31.877,21.844) 29.21,24.511 29.21,28.448 32.106,31.344 v2(32.106,33.65)
C_RST: C12.2 J1.19 R9.2 U1.33 | length 24.3
  Top Layer w0.2: J1.19 20.82,14.978 20.82,13.391 C12.2 ; U1.33 28.393,31.183 R9.2
  Bottom Layer w0.2: v1(20.828,13.97) 20.828,19.812 24.003,22.987 24.003,28.956 26.162,31.115 v1(27.813,31.115)
D0: J1.1 U1.12 | length 12.4
  Top Layer w0.2: U1.12 9.562,26.103 10.287,25.378 10.287,21.463 11.812,19.938 J1.1
D1: J1.2 U1.17 | length 5
  Top Layer w0.2: J1.2 12.312,20.758 13.562,22.008 U1.17
D2: J1.6 U1.21 | length 7.3
  Top Layer w0.2: J1.6 14.312,19.364 15.347,20.399 17.033,20.399 18.642,22.008 U1.21
D3: J1.4 U1.19 | length 6
  Top Layer w0.2: J1.4 13.312,19.789 14.732,21.209 15.208,21.209 15.662,21.663 15.757,21.663 16.102,22.008 U1.19
D4: J1.3 U1.18 | length 8.5
  Top Layer w0.2: J1.3 12.812,20.559 13.589,21.336 14.16,21.336 14.832,22.008 U1.18
D5: J1.5 U1.20 | length 9.5
  Top Layer w0.2: J1.5 13.812,19.527 15.113,20.828 16.256,20.828 17.027,21.599 17.027,21.968 U1.20
D6: J1.7 U1.25 | length 15.6
  Top Layer w0.2: J1.7 14.812,14.436 15.532,13.716 16.778,13.716 17.272,14.21 17.272,15.682 17.846,16.256 18.288,16.256 18.796,16.764 18.796,18.669 19.05,18.923 19.685,18.923 21.463,20.701 22.606,20.701 23.377,21.472 23.377,21.968 U1.25
D7: J1.9 U1.23 | length 10.8
  Top Layer w0.2: J1.9 15.812,15.536 16.786,16.51 17.526,16.51 17.78,16.764 17.78,20.066 18.415,20.701 19.875,20.701 21.182,22.008 U1.23
DRN_RX: J3.6 U1.4 | length 25.2
  Top Layer w0.2: U1.4 9.325,36.195 v1(10.414,36.195) ; v1(32.258,37.973) 32.312,37.973 33.05,37.235 J3.6
  Bottom Layer w0.2: v1(10.414,36.195) 12.192,37.973 v1(32.258,37.973)
DRN_TX: J3.5 U1.5 | length 25.1
  Top Layer w0.2: U1.5 9.325,34.925 v1(10.414,34.925) ; v1(32.258,36.449) 32.306,36.401 32.384,36.401 33.05,35.735 J3.5
  Bottom Layer w0.2: v1(10.414,34.925) 26.289,34.925 27.813,36.449 v1(32.258,36.449)
GND: C1.1 C2.1 C3.2 C4.2 C5.2 C6.2 C7.2 C8.2 C9.2 C10.2 C11.2 C12.1 C13.2 C14.2 D2.2 J1.10 J1.23 J2.A1_B12 J2.B1_A12 J3.4 J4.6 J4.7 J4.8 pad.7 R1.2 R2.2 R5.1 R6.2 R7.2 R10.1 U1.1 U1.40 U1.41 U1.42 U1.43 U1.44 U1.45 U1.46 U1.47 U1.48 U1.49 U2.1 U3.2 U4.1
  other v1: 23.241,7.62 23.114,8.255 13.081,8.636 13.081,9.271 6.35,36.957 6.477,38.481
HSYNC: J1.16 U1.31 | length 16
  Top Layer w0.2: J1.16 19.312,18.336 19.412,18.436 19.726,18.436 21.483,20.193 24.384,20.193 25.781,21.59 25.781,27.972 26.452,28.643 U1.31
IO1: J3.2 U1.39 | length 11.7
  Top Layer w0.2: U1.39 26.825,38.735 28.829,38.735 31.496,36.068 31.496,32.789 33.05,31.235 J3.2
IO2: J3.1 U1.38 | length 12.2
  Top Layer w0.2: U1.38 29.269,37.533 30.988,35.814 30.988,31.797 33.05,29.735 J3.1
IO6: J4.5 U1.6 | length 8.4
  Top Layer w0.2: J4.5 1.699,35.687 3.429,35.687 5.393,33.723 U1.6
IO7: J4.4 U1.7 | length 8.3
  Top Layer w0.2: J4.4 3.738,34.235 5.52,32.453 U1.7
IO16: J4.3 U1.9 | length 8.8
  Top Layer w0.2: J4.3 1.682,32.766 4.064,32.766 6.917,29.913 U1.9
IO17: J4.2 U1.10 | length 8.7
  Top Layer w0.2: J4.2 1.658,31.242 4.318,31.242 6.917,28.643 U1.10
IO18: J4.1 U1.11 | length 8.6
  Top Layer w0.2: J4.1 4.555,29.735 6.917,27.373 U1.11
LED: D3.2 U1.8 | length 13.8
  Top Layer w0.2: D3.2 5.409,21.59 v1(6.223,21.59) ; v1(8.001,31.242) 9.198,31.242 U1.8
  Bottom Layer w0.2: v1(6.223,21.59) 4.699,23.114 4.699,24.185 5.969,25.455 5.969,29.21 v1(8.001,31.242)
MCLK: J1.12 U1.22 | length 6
  Top Layer w0.2: J1.12 17.312,20.106 18.415,21.209 19.113,21.209 19.912,22.008 U1.22
NetD1_1: D1.1 J2.A4_B9 J2.B4_A9 | length 13.9
  Top Layer w0.5: J2.A4_B9 15.657,7.58 15.657,7.007 16.274,6.39 19.74,6.39 19.922,6.572 ; 19.939,6.175 19.939,6.39 ; J2.B4_A9@20.457,7.815 20.457,7.68 20.357,7.58 20.357,7.007 19.939,6.589 19.939,6.39 ; D1.1 24.257,6.558 23.114,5.415 20.699,5.415 20.232,5.415 19.939,5.708 19.939,6.39
NetD2_1: D2.1 J2.A7 J2.B7 | length 5.8
  Top Layer w0.2: D2.1 18.195,10.31 17.595,10.31 17.257,9.972 J2.B7 17.307,7.58 17.307,7.069 17.523,6.853 18.032,6.853 18.207,7.028 18.207,7.58 J2.A7
NetD2_3: D2.3 J2.A6 J2.B6 | length 4.2
  Top Layer w0.2: J2.A6 17.757,8.44 ; D2.3 17.9,9.36 17.757,9.217 17.757,8.44 ; J2.B6 18.707,7.68 18.707,8.552 18.542,8.717 18.034,8.717 17.85,8.533 17.757,8.44
NetD3_1: D3.1 R6.1 | length 1.1
  Top Layer w0.3: R6.1 2.821,21.556 3.874,21.556 D3.1
NetD4_1: D4.1 R7.1 | length 1.1
  Top Layer w0.3: R7.1 D4.1
NetJ1_17: J1.17 R5.2 | length 5.5
  Top Layer w0.2: J1.17 19.812,12.065 20.574,11.303 R5.2
NetJ2_A5: J2.A5 R2.1 | length 2.4
  Top Layer w0.2: R2.1@15.482,9.298 15.782,8.998 16.148,8.998 16.707,8.439 16.707,7.68 J2.A5 ; R2.1@15.782,9.333 R2.1@15.802,9.333
NetJ2_B5: J2.B5 R1.1 | length 5.4
  Top Layer w0.2: J2.B5 19.807,7.68 19.807,8.331 20.066,8.59 22.618,8.59 23.488,9.46 23.588,9.46 R1.1@23.888,9.76
NetR3_2: R3.2 U1.14 | length 1.8
  Top Layer w0.2: R3.2 9.016,23.322 U1.14
NetR4_2: R4.2 U1.13 | length 1.7
  Top Layer w0.2: R4.2 7.672,24.833 U1.13
PCLK: C1.2 J1.8 U1.24 | length 12.2
  Top Layer w0.2: J1.8 15.276,17.822 15.276,18.887 v1(15.24,18.923) 15.288,18.971 15.288,19.04 15.677,19.429 C1.2 ; U1.24 22.479,22.34 v1(22.479,23.495)
  Bottom Layer w0.2: v1(15.24,18.923) 19.812,23.495 v1(22.479,23.495)
RESET: C11.1 R8.2 R10.2 U1.3 | length 5.1
  Top Layer w0.2: R10.2 7.216,36.214 R8.2 C11.1 9.117,37.673 U1.3
SCL: J1.20 R11.1 U1.34 | length 21.9
  Top Layer w0.2: J1.20 21.312,18.336 22.153,19.177 24.765,19.177 28.019,22.431 28.019,28.908 28.702,29.591 28.702,30.471 28.938,30.706 28.938,32.566 28.738,32.766 R11.1 ; U1.34 27.055,32.751 R11.1@28.702,32.751
SDA: J1.22 R12.1 U1.35 | length 26.3
  Top Layer w0.2: J1.22 22.312,17.236 22.94,16.608 25.401,16.608 25.908,17.115 25.908,19.558 28.321,21.971 28.321,28.067 30.607,30.353 30.607,32.258 30.314,32.551 30.157,32.551 30.036,32.672 30.036,32.829 29.686,32.829 29.564,32.951 29.564,33.018 29.181,33.401 27.079,33.401 U1.35
USB_N: D2.6 R4.1 | length 23.4
  Top Layer w0.2: v1(5.584,24.097) 5.636,24.097 6.158,24.619 R4.1 ; D2.6 19.905,10.41 20.426,10.41 20.43,10.414 v1(20.955,10.414)
  Bottom Layer w0.2: v1(5.584,24.097) 5.621,24.097 5.826,23.893 6.283,23.893 20.158,10.017 20.558,10.017 v1(20.955,10.414)
USB_P: D2.4 R3.1 | length 23.6
  Top Layer w0.2: v1(5.334,23.495) 6.085,23.495 6.158,23.422 R3.1 ; D2.4 20.798,9.36 20.887,9.271 v1(20.955,9.271)
  Bottom Layer w0.2: v1(5.334,23.495) 5.382,23.543 6.138,23.543 20.014,9.667 20.559,9.667 v1(20.955,9.271)
VSYNC: J1.18 U1.32 | length 17.4
  Top Layer w0.2: J1.18 20.312,18.336 21.661,19.685 24.511,19.685 27.717,22.891 27.717,29.258 27.062,29.913 U1.32
pads on no net: J1.11 J1.13 J1.24 J1.SH1 J1.SH2 J1.SH3 J1.SH4 J2. J2.A8 J2.B8 J2.SH1 J2.SH2 J2.SH3 J2.SH4 U1.15 U1.16 U1.26 U1.27 U1.28 U1.29 U1.30 U1.36 U1.37 U3.4

## Polygon pours and split planes (outlines as drawn)
GND on Bottom Layer "GND_L02_P001" (solid, pour order 1): 0.127,1.224 35.052,1.224 35.052,41.864 0.127,41.864
GND on Top Layer "GND_L01_P000" (solid, pour order 0): 0.127,1.224 35.052,1.224 35.052,41.864 0.127,41.864

## Silkscreen, mask and mechanical layers (free items; w line width, h text height)
Top Overlay:
  drawing of 10 lines, arcs and shapes, not listed
  text "GND" at 2.974,39.571 h0.75 r270
  text "3V3" at 32.143,38.48 h0.75 r90
  text "RX" at 31.041,36.883 h0.75
  text "TX" at 31.041,35.359 h0.75
  text "IO6" at 2.784,35.313 h0.75
  text "GND" at 30.406,34.216 h0.75
  text "IO7" at 2.784,33.813 h0.75
  text "IO16" at 2.784,32.313 h0.75
  text "5V" at 31.041,32.311 h0.75
  text "IO1" at 30.787,30.914 h0.75
  text "IO17" at 2.784,30.813 h0.75
  text "IO2" at 30.533,29.39 h0.75
  text "IO18" at 2.784,29.313 h0.75
  text "ESP-CAM v1.1" at 8.378,11.299 h1
  text "Made by:" at 8.378,9.981 h1
Mechanical 0:
  lines w0.254: 0.127,40.005 0.127,6.431 ccw(c5.312,6.431) 5.312,1.246 29.359,1.246 ccw(c29.359,6.917) 35.03,6.917 35.021,40.01 ccw(c33.167,40.01) 33.167,41.864 ; 0.129,40.007 cw(c1.91,40.083) 1.993,41.864

## Text inside footprints (layer, text, board x,y; h text height)
J2: Top 3D Body "PCB EDGE" at 23.407,0.375 h0.41
U1: Top 3D Body "*" at 10.324,39.438 h1.27